# Altium PCB ADCAN_21_22.PcbDoc (part 1 of 2)
Units mm, origin at the board's own origin, x right, y up, seen from the top; angles counter-clockwise.
Board outline 65 x 55 mm, 4 copper layers (Top Layer, GND, 5V, Bottom Layer), stack 0.603 mm thick; 114 components, 59 nets, 280 pads, 0 vias.
Unrouted connection lines stored in the file: 212.
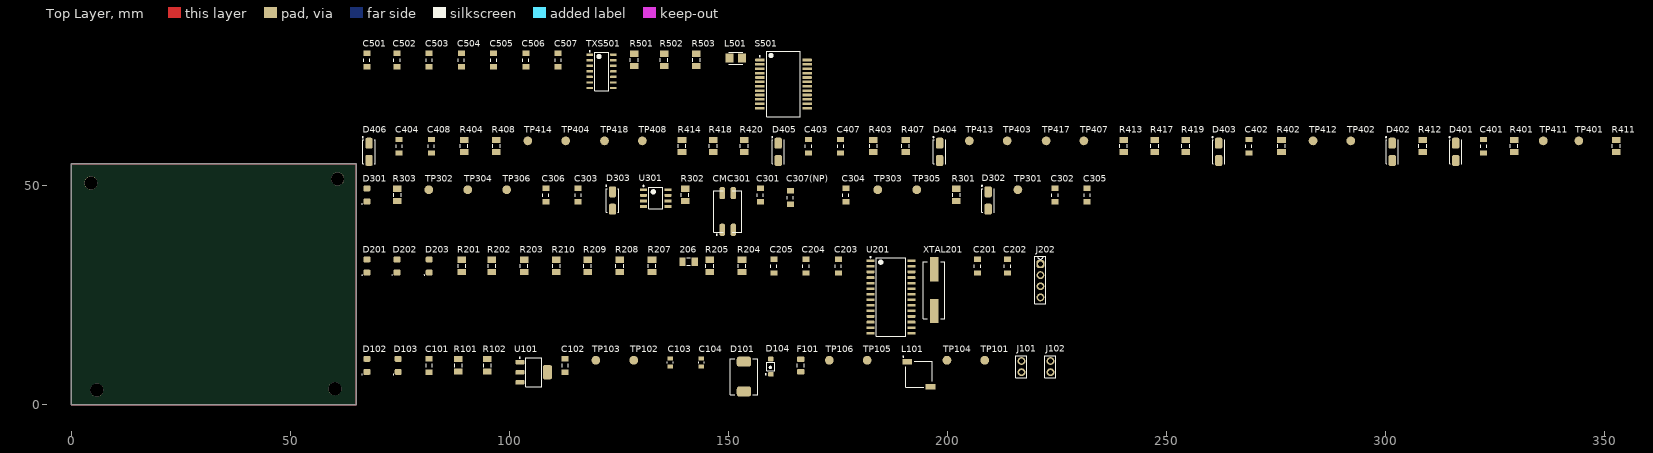
[diagram p0: Top Layer view]
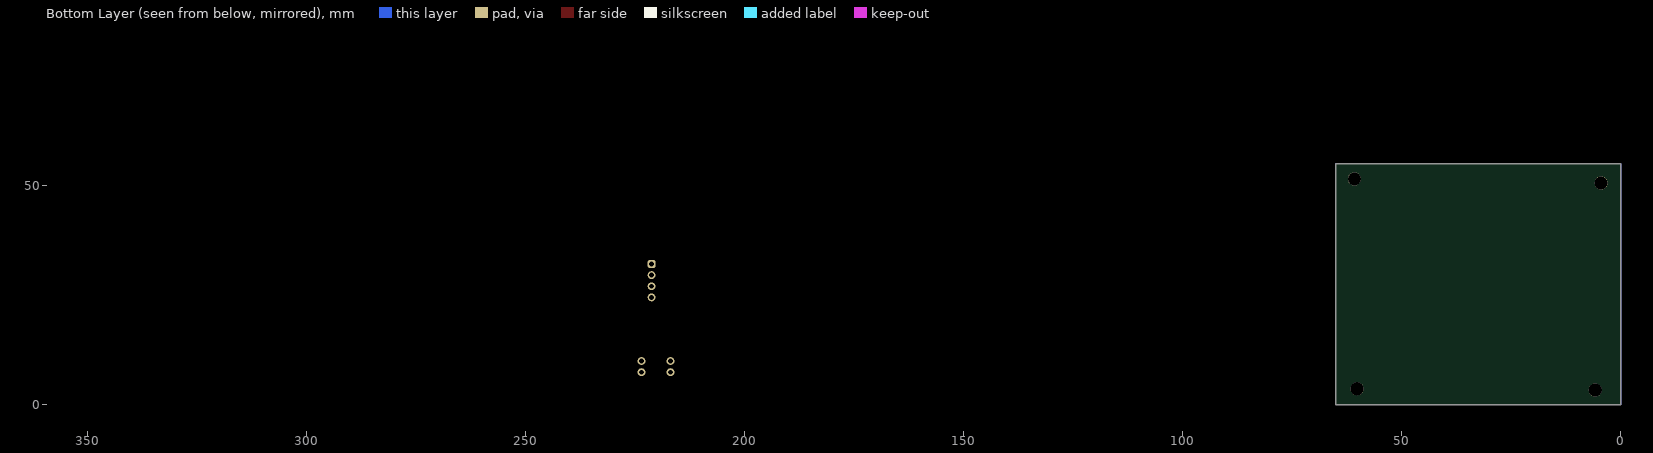
[diagram p1: Bottom Layer view, seen from below]
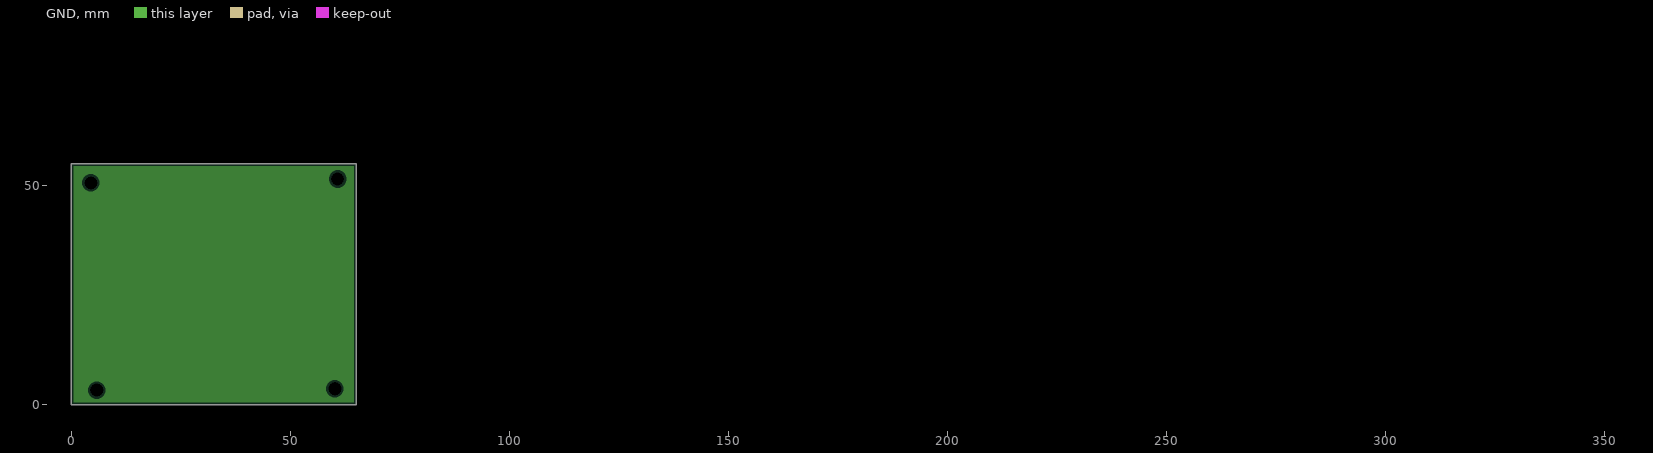
[diagram p2: GND, clearances drawn from the general rule]
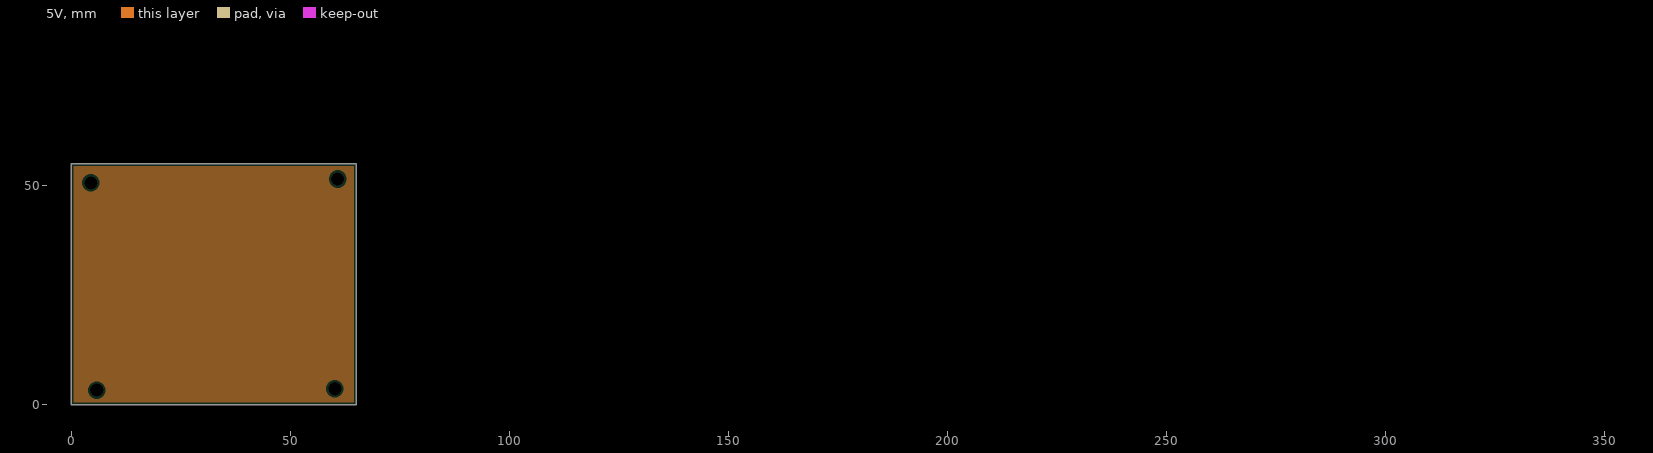
[diagram p3: 5V, clearances drawn from the general rule]

## Layer stack, top to bottom
Top Solder: solder mask 0.0102, Solder Resist, Dk 3.5
Top Layer: signal copper 0.0356
Dielectric 2: prepreg 0.0711, PP-006, Dk 4.1
GND: plane copper 0.035
Dielectric 1: dielectric 0.32, FR-4, Dk 4.8
5V: plane copper 0.035
Dielectric 3: prepreg 0.0711, PP-006, Dk 4.1
Bottom Layer: signal copper 0.0356
Bottom Solder: solder mask 0.0102, Solder Resist, Dk 3.5

## Board outline
0,0 0,55 65,55 65,0

## Design rules (kind name [scope] priority, off if disabled: settings)
Clearance [All] p1: gap=0.254 ignorepadtopadclearanceinfootprint=TRUE except(0: Arc-Hole Track-Hole SMDPad-Hole THPad-Hole Via-Hole Fill-Hole Poly-Hole Region-Hole Text-Hole)
PlaneClearance [All] p1: clearance=0.508
PlaneConnect [All] p1: planeconnectstyle=Relief reliefexpansion=0.508 reliefentries=4 reliefconductorwidth=0.254 reliefairgap=0.254
PolygonConnect [All] p1: connectstyle=Relief reliefconductorwidth=0.254 reliefentries=4 polygonreliefangle="90 Angle" airgapwidth=0.254
RoutingVias [All] p1: holewidth=0.711 width=1.27 viastyle="Through Hole" minholewidth=0.711 minwidth=1.27 maxholewidth=0.711 maxwidth=1.27
SolderMaskExpansion [All] p1: expansion=0.102 istentingtop=FALSE
Width [All] p1: maxlimit=0.254 minlimit=0.254 preferedwidth=0.254
28 further rules are at their usual default settings.

## Classes and differential pairs
component class main: J1

## Components (designator, comment, footprint, x,y, rotation, side; value= is the part's Value field where it differs from the comment)
206 "CRS1206-FX-4701ELF" R1206FTK-W 140.933,32.678 r0 top
C101 "885012208018" C1206FNPC-RW 81.681,8.952 r90 top
C102 "885012208018" C1206FNPC-RW 112.732,8.952 r90 top
C103 "885012207103" C0805FNPC-R 136.758,9.652 r90 top
C104 "885012207103" C0805FNPC-R 143.859,9.652 r90 top
C201 "885012008038" C1206FNPC-RW 206.912,31.653 r90 top
C202 "885012008038" C1206FNPC-RW 213.762,31.653 r90 top
C203 "885012208009" C1206FNPC-RW 175.135,31.653 r90 top
C204 "885012208009" C1206FNPC-RW 167.76,31.653 r90 top
C205 "885012208009" C1206FNPC-RW 160.409,31.653 r90 top
C301 "885012208025" C1206FNPC-RW 157.309,47.879 r90 top
C302 "885012208025" C1206FNPC-RW 224.613,47.879 r90 top
C303 "885012208025" C1206FNPC-RW 115.707,47.879 r90 top
C304 "885012208009" C1206FNPC-RW 176.86,47.879 r90 top
C305 "885012208025" C1206FNPC-RW 231.963,47.879 r90 top
C306 "885012208025" C1206FNPC-RW 108.357,47.879 r90 top
C307(NP) "885012208025" C1206FNPC-RW 164.16,47.304 r90 top
C401 "885012208009" C1206FNPC-RW 322.492,59.029 r90 top
C402 "885012208009" C1206FNPC-RW 268.89,59.029 r90 top
C403 "885012208009" C1206FNPC-RW 168.31,59.029 r90 top
C404 "885012208009" C1206FNPC-RW 74.83,59.029 r90 top
C407 "885012208009" C1206FNPC-RW 175.66,59.029 r90 top
C408 "885012208009" C1206FNPC-RW 82.206,59.029 r90 top
C501 "885012208036" C1206FNPC-RW 67.455,78.705 r90 top
C502 "885012208036" C1206FNPC-RW 74.33,78.705 r90 top
C503 "885012208011" C1206FNPC-RW 81.681,78.705 r90 top
C504 "885012108012" C1206FNPC-RW 89.056,78.705 r90 top
C505 "885012208009" C1206FNPC-RW 96.406,78.705 r90 top
C506 "885012108012" C1206FNPC-RW 103.782,78.705 r90 top
C507 "885012208036" C1206FNPC-RW 111.132,78.705 r90 top
CMC301 "744226" CMC_10u_1.6A 149.884,44.128 r90 top
D101 "824551301" DTVS-DO-214AB 153.584,6.427 r90 top
D102 "150120VS75000" LED_1206_WE 67.48,8.977 r90 top
D103 "150120VS75000" LED_1206_WE 74.605,8.977 r90 top
D104 "MBR0530" DSC-SOD123 159.734,8.702 r90 top
D201 "150120BS75000" LED_1206_WE 67.48,31.678 r90 top
D202 "150120YS75000" LED_1206_WE 74.355,31.678 r90 top
D203 "150120RS75000" LED_1206_WE 81.706,31.678 r90 top
D301 "150120BS75000" LED_1206_WE 67.48,47.904 r90 top
D302 "824501600" DTVS-DO-214AC 209.337,46.629 r90 top
D303 "824501600" DTVS-DO-214AC 123.558,46.629 r90 top
D401 "824501600" DTVS-DO-214AC 316.117,57.754 r90 top
D402 "824501600" DTVS-DO-214AC 301.616,57.754 r90 top
D403 "824501600" DTVS-DO-214AC 261.989,57.754 r90 top
D404 "824501600" DTVS-DO-214AC 198.261,57.754 r90 top
D405 "824501600" DTVS-DO-214AC 161.409,57.754 r90 top
D406 "824501600" DTVS-DO-214AC 67.955,57.754 r90 top
F101 "0437001.WRA" Fuse_1206 166.56,8.952 r90 top
J101 "61300211121" J_Pinheader_1x2 216.962,8.702 r90 top
J102 "61300211121" J_Pinheader_1x2 223.588,8.702 r90 top
J202 "61300411121" J_PinHeader_1x4 221.287,27.053 r0 top
L101 "CDC5D23BNP-470KC" L_47u-490mA_CF 193.536,6.952 r0 top
L501 "744764147" L47u-60mA_CF 151.709,79.155 r0 top
R101 "CRG1206F100R" R1206FTK-W 88.381,9.002 r90 top
R102 "CRG1206F100R" R1206FTK-W 94.981,9.002 r90 top
R201 "CRG1206F100R" R1206FTK-W 89.156,31.703 r90 top
R202 "CRG1206F100R" R1206FTK-W 96.006,31.703 r90 top
R203 "CRG1206F100R" R1206FTK-W 103.382,31.703 r90 top
R204 "CR1206-FX-2201ELF" R1206FTK-W 153.134,31.703 r90 top
R205 "CRS1206-FX-4701ELF" R1206FTK-W 145.784,31.703 r90 top
R207 "CR1206-FX-2201ELF" R1206FTK-W 132.583,31.703 r90 top
R208 "CRS1206-FX-4701ELF" R1206FTK-W 125.208,31.703 r90 top
R209 "CRS1206-FX-4701ELF" R1206FTK-W 117.857,31.703 r90 top
R210 "CRS1206-FX-4701ELF" R1206FTK-W 110.732,31.703 r90 top
R301 "RQ73C2B60R4BTDF" R1206FTK-W 202.086,47.929 r90 top value=60R4
R302 "RQ73C2B60R4BTDF" R1206FTK-W 140.133,47.929 r90 top value=60R4
R303 "CRG1206F100R" R1206FTK-W 74.43,47.929 r90 top
R401 "CRCW12061K60FKEA" R1206FTK-W 329.443,59.079 r90 top
R402 "CRCW12061K60FKEA" R1206FTK-W 276.34,59.079 r90 top
R403 "CRCW12061K60FKEA" R1206FTK-W 183.136,59.079 r90 top
R404 "CRCW12061K60FKEA" R1206FTK-W 89.681,59.079 r90 top
R407 "CRCW12064K30FKEA" R1206FTK-W 190.486,59.079 r90 top
R408 "CRCW12064K30FKEA" R1206FTK-W 97.031,59.079 r90 top
R411 "CRCW12061K60FKEA" R1206FTK-W 352.794,59.079 r90 top
R412 "CRCW12061K60FKEA" R1206FTK-W 308.617,59.079 r90 top
R413 "CRCW12061K60FKEA" R1206FTK-W 240.288,59.079 r90 top
R414 "CRCW12061K60FKEA" R1206FTK-W 139.433,59.079 r90 top
R417 "CRCW12061K60FKEA" R1206FTK-W 247.389,59.079 r90 top
R418 "CRCW12061K60FKEA" R1206FTK-W 146.559,59.079 r90 top
R419 "CRCW12066K19FKEA" R1206FTK-W 254.489,59.079 r90 top
R420 "CRCW12066K19FKEA" R1206FTK-W 153.659,59.079 r90 top
R501 "CRS1206-FX-4701ELF" R1206FTK-W 128.508,78.755 r90 top
R502 "CRS1206-FX-4701ELF" R1206FTK-W 135.358,78.755 r90 top
R503 "CRS1206-FX-4701ELF" R1206FTK-W 142.734,78.755 r90 top
S501 "SCC2230-D08" Accel_SCC2230-D08 162.61,73.23 r0 top
TP101 "TestPoint" TestPoint 208.562,10.152 r90 top
TP102 "TestPoint" TestPoint 128.408,10.152 r90 top
TP103 "TestPoint" TestPoint 119.757,10.152 r90 top
TP104 "TestPoint" TestPoint 199.936,10.152 r90 top
TP105 "TestPoint" TestPoint 181.71,10.152 r90 top
TP106 "TestPoint" TestPoint 173.085,10.152 r90 top
TP301 "TestPoint" TestPoint 216.137,49.104 r90 top
TP302 "TestPoint" TestPoint 81.606,49.104 r90 top
TP303 "TestPoint" TestPoint 184.136,49.104 r90 top
TP304 "TestPoint" TestPoint 90.506,49.104 r90 top
TP305 "TestPoint" TestPoint 193.036,49.104 r90 top
TP306 "TestPoint" TestPoint 99.381,49.104 r90 top
TP401 "TestPoint" TestPoint 344.243,60.254 r90 top
TP402 "TestPoint" TestPoint 292.166,60.254 r90 top
TP403 "TestPoint" TestPoint 213.687,60.254 r90 top
TP404 "TestPoint" TestPoint 112.857,60.254 r90 top
TP407 "TestPoint" TestPoint 231.213,60.254 r90 top
TP408 "TestPoint" TestPoint 130.383,60.254 r90 top
TP411 "TestPoint" TestPoint 336.118,60.254 r90 top
TP412 "TestPoint" TestPoint 283.54,60.254 r90 top
TP413 "TestPoint" TestPoint 205.062,60.254 r90 top
TP414 "TestPoint" TestPoint 104.232,60.254 r90 top
TP417 "TestPoint" TestPoint 222.587,60.254 r90 top
TP418 "TestPoint" TestPoint 121.733,60.254 r90 top
TXS501 "TXS0104E" 4bitBVL_TXS0104E 121.058,76.13 r0 top
U101 "LM1117IMP-3.3/NOPB" LDO_10V-0.8/3V3-SOT223 105.557,7.402 r0 top
U201 "PIC18F2685" U_PIC18F2685 187.161,24.603 r0 top
U301 "MCP2561-H/SN" Transceiver_CAN 133.433,47.179 r0 top
XTAL201 "830028710" XTAL20M_SMD 197.011,26.178 r90 top

## Footprints (in the part's own frame and the unit in brackets; to place one, negate y for a bottom-side part, rotate by r counter-clockwise, add the part's x,y. Pads: shape width x height; smd on the part's side, far side on the other; paste and mask are expansions set on the pad)
4bitBVL_TXS0104E [mm] "SOP, 14-Leads, Body 8,65x3,90mm, Pitch 1,27mm, IPC Medium Density"
  rrect50% 1.5x0.55 smd: 1(-2.7,3.81) 2(-2.7,2.54) 3(-2.7,1.27) 4(-2.7,0) 5(-2.7,-1.27) 6(-2.7,-2.54) 7(-2.7,-3.81) 8(2.7,-3.81) 9(2.7,-2.54) 10(2.7,-1.27) 11(2.7,0) 12(2.7,1.27) 13(2.7,2.54) 14(2.7,3.81)
  silkscreen extent -2.82,-4.4 1.6,4.76, body extent -3.01,-4.32 3.01,4.33, height 1.75
Accel_SCC2230-D08 [mm] "SOP, 24-Leads, Body 15,00x8,50mm, Pitch 1,00mm, IPC Medium Density"
  rrect50% 2.2x0.6 smd: 1(-5.4,5.5) 2(-5.4,4.5) 3(-5.4,3.5) 4(-5.4,2.5) 5(-5.4,1.5) 6(-5.4,0.5) 7(-5.4,-0.5) 8(-5.4,-1.5) 9(-5.4,-2.5) 10(-5.4,-3.5) 11(-5.4,-4.5) 12(-5.4,-5.5) 13(5.4,-5.5) 14(5.4,-4.5) 15(5.4,-3.5) 16(5.4,-2.5) 17(5.4,-1.5) 18(5.4,-0.5) 19(5.4,0.5) 20(5.4,1.5) 21(5.4,2.5) 22(5.4,3.5) 23(5.4,4.5) 24(5.4,5.5)
  silkscreen extent -5.52,-7.5 3.85,7.5, body extent -6.05,-7.5 6.05,7.5, height 4.36
C0805FNPC-R [mm]
  rect 0.9x1.3 smd: 1(-0.95,0) 2(0.95,0)
  silkscreen extent -0.15,-0.65 0.15,0.65, body extent -1.03,-0.63 0.97,0.63, height 0.96
C1206FNPC-RW [mm] "Chip Capacitor, 2-Leads, Body 3,20x1,60mm, IPC Medium Density"
  rect 1.2x1.6 smd: 1(-1.55,0) 2(1.55,0)
  silkscreen extent -0.35,-0.7 0.35,0.7, body extent -1.59,-0.77 1.61,0.83, height 0.91
CMC_10u_1.6A [mm] "Molded Inductor, 2-Leads, Body 9,20x6,00mm, IPC Low Density"
  rrect50% 2.75x1.2 smd: 1(-4.174,1.273) 2(-4.176,-1.273) 3(4.174,-1.273) 4(4.176,1.273)
  silkscreen extent -5.45,-3.15 4.75,3.15, body extent -4.6,-3 4.6,3, height 5.01
DSC-SOD123 [mm] "SOIC, 2-Leads, Body 1,60x2,69mm, Pitch 1,27mm, IPC Low Density"
  rrect50% 1.1x1.3 smd: A(1.75,0) K(-1.75,0)
  silkscreen extent -1.87,-0.9 1,1.32, body extent -1.86,-0.8 1.86,0.8, height 1.36
DTVS-DO-214AB [mm] "Molded Diode, 2-Leads, Body 7,94x5,90mm"
  rrect50% 2.3x3.3 smd: 1(-3.4,0) 2(3.4,0)
  silkscreen extent -4.1,-3.15 4.1,3.15, body extent -4.42,-2.95 4.42,2.95, height 2.9
DTVS-DO-214AC [mm] "Molded Diode, 2-Leads, Body 5,11x2,67mm, IPC Medium Density"
  rrect50% 2.5x1.7 smd: 1(-1.975,0) 2(1.975,0)
  silkscreen extent -2.7,-1.4 3.47,1.52, body extent -2.56,-1.34 2.56,1.34, height 2.5
Fuse_1206 [mm] "Chip Resistor, 2-Leads, Body 3,20x1,58mm, IPC Medium Density"
  rrect50% 1.25x1.75 smd: 1(-1.425,0) 2(1.425,0)
  silkscreen extent -0.4,-0.77 0.4,0.77, body extent -1.6,-0.79 1.6,0.79, height 0.86
J_Pinheader_1x2 [mm]
  round 1.8 hole 1.1: 1(-1.27,0) 2(1.27,0)
  silkscreen extent -2.52,-1.25 2.48,1.29, body extent -2.54,-1.27 2.54,1.27, height 9.5
J_PinHeader_1x4 [mm]
  rrect50% 1.8x1.8 hole 1.1: 1(0,5.08)
  round 1.8 hole 1.1: 2(0,2.54) 3(0,0) 4(0,-2.54)
  silkscreen extent -1.25,-4.03 1.25,6.83, body extent -1.27,-3.81 1.27,6.35, height 9.5
L47u-60mA_CF [mm] "Molded Inductor, 2-Leads, Body 2,90x2,50mm, IPC Low Density"
  rect 1.85x2 smd: 1(-1.425,0) 2(1.425,0)
  silkscreen extent -1.55,-1.35 1.55,1.35, body extent -1.6,-1.25 1.6,1.25, height 2.21
L_47u-490mA_CF [mm] "Precision Wire Wound Inductor, 2-Leads, Body 5,80x5,80mm, IPC Medium Density"
  rect 2.2x1.3 smd: 1(-2.65,2.825) 2(2.643,-2.832)
  silkscreen extent -3.67,-3 3,4.17, body extent -3,-3 3,3, height 2.5
LDO_10V-0.8/3V3-SOT223 [mm] "SOT223, 4-Leads, Body 6,50x7,00mm (avg), Pitch 2,30mm, IPC Low Density"
  rrect50% 2.1x1 smd: 1(-3.15,2.3) 2(-3.15,0) 3(-3.15,-2.3)
  rrect50% 2.1x3.3 smd: 4(3.15,0)
  silkscreen extent -3.27,-3.35 1.8,3.47, body extent -3.5,-3.25 3.5,3.25, height 1.81
LED_1206_WE [mm] "SODFL, 2-Leads, Body 1,60x3,20mm, IPC Medium Density"
  rrect50% 1.4x1.6 smd: A(1.5,0) K(-1.5,0)
  silkscreen extent -2.15,1.05 -2.05,1.15, body extent -1.6,-0.8 1.6,0.8, height 0.68
R1206FTK-W [mm] "Chip Resistor, 2-Leads, Body 3,15x1,60mm, IPC Medium Density"
  rect 1.4x1.95 smd: 1(-1.4,0) 2(1.4,0)
  silkscreen extent -0.4,-0.87 0.4,0.87, body extent -1.58,-0.8 1.58,0.8, height 0.61
TestPoint [mm]
  round 2 smd: 1(0,0)
Transceiver_CAN [mm] "SOIC, 8-Leads, Body 4,90x3,90mm, Pitch 1,27mm, IPC Low Density"
  rrect50% 1.7x0.65 smd: 1(-2.8,1.905) 2(-2.8,0.635) 3(-2.8,-0.635) 4(-2.8,-1.905) 5(2.8,-1.905) 6(2.8,-0.635) 7(2.8,0.635) 8(2.8,1.905)
  silkscreen extent -2.92,-2.45 1.55,2.9, body extent -2.98,-2.43 3.02,2.47, height 1.76
U_PIC18F2685 [mm] "SOIC, 28-Leads, Body 17,90x7,50mm, Pitch 1,27mm, IPC Medium Density"
  rrect50% 1.85x0.6 smd: 1(-4.675,8.255) 2(-4.675,6.985) 3(-4.675,5.715) 4(-4.675,4.445) 5(-4.675,3.175) 6(-4.675,1.905) 7(-4.675,0.635) 8(-4.675,-0.635) 9(-4.675,-1.905) 10(-4.675,-3.175) 11(-4.675,-4.445) 12(-4.675,-5.715) 13(-4.675,-6.985) 14(-4.675,-8.255) 15(4.675,-8.255) 16(4.675,-6.985) 17(4.675,-5.715) 18(4.675,-4.445) 19(4.675,-3.175) 20(4.675,-1.905) 21(4.675,-0.635) 22(4.675,0.635) 23(4.675,1.905) 24(4.675,3.175) 25(4.675,4.445) 26(4.675,5.715) 27(4.675,6.985) 28(4.675,8.255)
  silkscreen extent -4.8,-8.95 3.35,9.23, body extent -5.15,-8.95 5.15,8.95, height 2.66
XTAL20M_SMD [mm]
  rect 5.5x2 smd: 1(-4.75,0) 2(4.75,0)
  silkscreen extent -6.5,-2.45 6.5,2.45, body extent -6.65,-2.47 6.65,2.48, height 4.3

## Part data
206 R205 R208 R209 R210 R501 R502 R503: library part R4.7K-1206FTK, "Res Thick Film 1206 4.7K Ohm 1% 1/2W ±100ppm/°C Molded SMD T/R", Case Code (Imperial)=1206, Case Code (Metric)=3016, Manufacturer 1="Bourns JW Miller", Max Operating Temperature=155°C, Max Power Dissipation=500mW, Min Operating Temperature=-55°C, Resistance=4.7kR, Resistor Type="Thick Film", Supplier Part Number 1=CRS1206-FX-4701ELFCT-ND, Temperature Coefficient=100ppm/°C, Tolerance=1%, Voltage Rating=400V, Case/Package=1206, Category="Chip SMD Resistors", ComponentLink1Description=https://datasheet.ciiva.com/48986/70483705-48986735.pdf?src-supplier=Allied+Electronics, ComponentLink1URL=https://datasheet.ciiva.com/48986/70483705-48986735.pdf?src-supplier=Allied+Electronics, ComponentLink3Description=RS, ComponentLink3URL=https://es.rs-online.com/web/p/resistencias-de-montaje-en-superficie/8672965, Height=0.026inch, Length=0.122inch, Manufacturer Part Number 1=CRS1206-FX-4701ELF, Mount="Surface Mount", Number of Terminations=2, Packaging="Cut Tape", Power Rating=500mW, Pricing 1="1=0,42000, 10=0,35400, 100=0,13850, 1000=0,05796, 2500=0,05313 (USD)", REACH SVHC="No SVHC", RoHS=Yes, Supplier 1=Digi-Key, Termination=SMD/SMT, Voltage Rating (DC)=400V, Width=0.063inch, Working Voltage=400V
C101 C102: library part C10u-10V-1206FNPC-X7R, "Cap, 10ΜF, 10V, 10%, X7R, 1206", Capacitance=10uF, Case Code (Imperial)=1206, Case Code (Metric)=3216, Manufacturer 1="Wurth Electronics", Max Operating Temperature=125°C, Min Operating Temperature=-55°C, Supplier Part Number 1=732-7565-1-ND, Tolerance=10%, Voltage Rating=10V, Case/Package=1206, Category="Ceramic Capacitors", ComponentLink1Description=http://www.farnell.com/datasheets/2031895.pdf?src-supplier=Farnell, ComponentLink1URL=http://www.farnell.com/datasheets/2031895.pdf?src-supplier=Farnell, ComponentLink2Description=https://katalog.we-online.de/pbs/datasheet/885012208018.pdf?src-supplier=Digi-Key, ComponentLink2URL=https://katalog.we-online.de/pbs/datasheet/885012208018.pdf?src-supplier=Digi-Key, ComponentLink3Description=http://www.farnell.com/datasheets/2031895.pdf?src-supplier=Newark, ComponentLink3URL=http://www.farnell.com/datasheets/2031895.pdf?src-supplier=Newark, ComponentLink4Description="Wurth Elektronik", ComponentLink4URL=https://www.we-online.com/catalog/en/WCAP-CSGP-10VDC?sq=885012208018#885012208018, Length=0.126inch, Manufacturer Part Number 1=885012208018, Mount="Surface Mount", Packaging="Tape and Reel", Pricing 1="1=0,66000, 10=0,59800, 100=0,53600, 500=0,47400 (USD)", RoHS=Yes, RoHS Compliant=Yes, Stock 1=7, Supplier 1=Digi-Key, Thickness=0.075inch, Width=0.063inch
C103 C104: library part C1u-50V-0805FNPC-X7R, "Multilayer Ceramic Capacitor, Wcap-Csgp Series, 1 F, 10%, X7R, 50 V, 0805 [2012 Metric] Rohs Compliant: Yes", Capacitance=1uF, Case Code (Imperial)=0805, Case Code (Metric)=2012, Dielectric=X7R, Manufacturer 1="Wurth Electronics", Max Operating Temperature=85°C, Min Operating Temperature=-55°C, Supplier Part Number 1=1813523, Tolerance=10%, Voltage Rating=50V, .Creator=GP, Case/Package=0805, Category="Ceramic Capacitors", ComponentLink1Description=http://www.farnell.com/datasheets/1958501.pdf?src-supplier=Farnell, ComponentLink1URL=http://www.farnell.com/datasheets/1958501.pdf?src-supplier=Farnell, ComponentLink2Description=http://www.farnell.com/datasheets/1958501.pdf?src-supplier=Element14, ComponentLink2URL=http://www.farnell.com/datasheets/1958501.pdf?src-supplier=Element14, ComponentLink3Description=https://katalog.we-online.de/pbs/datasheet/885012107003.pdf?src-supplier=Digi-Key, ComponentLink3URL=https://katalog.we-online.de/pbs/datasheet/885012107003.pdf?src-supplier=Digi-Key, ComponentLink4Description=http://www.farnell.com/datasheets/1958501.pdf?src-supplier=Newark, ComponentLink4URL=http://www.farnell.com/datasheets/1958501.pdf?src-supplier=Newark, Length=0.079inch, Manufacturer Part Number 1=885012207103, Mount="Surface Mount", Packaging="Cut Tape", Pricing 1="50=0,27200, 250=0,25300, 500=0,22800, 1250=0,20100, 2500=0,17100 (GBP)", REACH SVHC=Unknown, RoHS=Yes, RoHS Compliant=Yes, Stock 1=5100, Supplier 1=RSComponents, Thickness=0.053inch, Voltage Rating (DC)=50V, Width=0.049inch
C201 C202: library part C15p-50V-1206FNPC-NP0, "Cap, 15Pf, 50V, 5%, C0G/np0, 1206 Rohs Compliant: Yes", Capacitance=15pF, Case Code (Imperial)=1206, Case Code (Metric)=3216, Manufacturer="Wurth Electronics", Max Operating Temperature=125°C, Min Operating Temperature=-55°C, Supplier Part Number 1=732-7882-1-ND, Tolerance=5%, Voltage Rating=50V, Case/Package=1206, Category=Capacitor, ComponentLink1Description=Datasheet, ComponentLink1URL=https://www.we-online.com/catalog/datasheet/885012008038.pdf, ComponentLink2Description="Where buy it", ComponentLink2URL=https://www.we-online.com/catalog/en/WCAP-CSGP-50VDC?sq=885012008038#885012008038, ComponentLink3Description=http://www.farnell.com/datasheets/2546700.pdf?src-supplier=Farnell, ComponentLink3URL=http://www.farnell.com/datasheets/2546700.pdf?src-supplier=Farnell, ComponentLink4Description=https://katalog.we-online.de/pbs/datasheet/885012008038.pdf?src-supplier=Digi-Key, ComponentLink4URL=https://katalog.we-online.de/pbs/datasheet/885012008038.pdf?src-supplier=Digi-Key, Length=0.126inch, Manufacturer Part Number=885012008038, Mount="Surface Mount", Packaging="Tape and Reel", Pricing 1="1=0,11000, 10=0,10000, 100=0,09000, 500=0,08000 (USD)", RoHS=Yes, RoHS Compliant=Yes, Stock 1=6999, Supplier 1=Digi-Key, Thickness=0.035inch, Width=0.063inch
C203 C304 C401 C402 C403 C404 C407 C408 C505: library part C100n-10V-1206FNPC-X7R, "Cap, 0.1ΜF, 10V, 10%, X7R, 1206", Capacitance=100nF, Case Code (Imperial)=1206, Case Code (Metric)=3216, Manufacturer 1="Wurth Electronics", Max Operating Temperature=125°C, Min Operating Temperature=-55°C, Supplier Part Number 1=732-8086-1-ND, Tolerance=10%, Voltage Rating=10V, Case/Package=1206, Category="Ceramic Capacitors", ComponentLink1Description=http://www.farnell.com/datasheets/2031891.pdf?src-supplier=Farnell, ComponentLink1URL=http://www.farnell.com/datasheets/2031891.pdf?src-supplier=Farnell, ComponentLink2Description=http://katalog.we-online.de/pbs/datasheet/885012208009.pdf?src-supplier=Digi-Key, ComponentLink2URL=http://katalog.we-online.de/pbs/datasheet/885012208009.pdf?src-supplier=Digi-Key, ComponentLink3Description=https://katalog.we-online.de/pbs/datasheet/885012208009.pdf?src-supplier=Digi-Key, ComponentLink3URL=https://katalog.we-online.de/pbs/datasheet/885012208009.pdf?src-supplier=Digi-Key, ComponentLink4Description="Wurth Elektronik", ComponentLink4URL=https://www.we-online.com/catalog/en/WCAP-CSGP-10VDC?sq=885012208009#885012208009, Length=0.126inch, Manufacturer Part Number 1=885012208009, Mount="Surface Mount", Packaging="Tape and Reel", Pricing 1="1=0,11000, 10=0,10300, 100=0,09200, 500=0,08100 (USD)", RoHS=Yes, RoHS Compliant=Yes, Stock 1=7198, Supplier 1=Digi-Key, Thickness=0.035inch, Width=0.063inch
C204: library part C100n-10V-1206FNPC-X7R, "Cap, 0.1ΜF, 10V, 10%, X7R, 1206", Capacitance=10nF, Case Code (Imperial)=1206, Case Code (Metric)=3216, Manufacturer 1="Wurth Electronics", Max Operating Temperature=125°C, Min Operating Temperature=-55°C, Supplier Part Number 1=732-8086-1-ND, Tolerance=10%, Voltage Rating=10V, Case/Package=1206, Category="Ceramic Capacitors", ComponentLink1Description=http://www.farnell.com/datasheets/2031891.pdf?src-supplier=Farnell, ComponentLink1URL=http://www.farnell.com/datasheets/2031891.pdf?src-supplier=Farnell, ComponentLink2Description=http://katalog.we-online.de/pbs/datasheet/885012208009.pdf?src-supplier=Digi-Key, ComponentLink2URL=http://katalog.we-online.de/pbs/datasheet/885012208009.pdf?src-supplier=Digi-Key, ComponentLink3Description=https://katalog.we-online.de/pbs/datasheet/885012208009.pdf?src-supplier=Digi-Key, ComponentLink3URL=https://katalog.we-online.de/pbs/datasheet/885012208009.pdf?src-supplier=Digi-Key, ComponentLink4Description="Wurth Elektronik", ComponentLink4URL=https://www.we-online.com/catalog/en/WCAP-CSGP-10VDC?sq=885012208009#885012208009, Length=0.126inch, Manufacturer Part Number 1=885012208009, Mount="Surface Mount", Packaging="Tape and Reel", Pricing 1="1=0,11000, 10=0,10300, 100=0,09200, 500=0,08100 (USD)", RoHS=Yes, RoHS Compliant=Yes, Stock 1=7198, Supplier 1=Digi-Key, Thickness=0.035inch, Width=0.063inch
C205: library part C100n-10V-1206FNPC-X7R, "Cap, 0.1ΜF, 10V, 10%, X7R, 1206", Capacitance=1uF, Case Code (Imperial)=1206, Case Code (Metric)=3216, Manufacturer 1="Wurth Electronics", Max Operating Temperature=125°C, Min Operating Temperature=-55°C, Supplier Part Number 1=732-8086-1-ND, Tolerance=10%, Voltage Rating=10V, Case/Package=1206, Category="Ceramic Capacitors", ComponentLink1Description=http://www.farnell.com/datasheets/2031891.pdf?src-supplier=Farnell, ComponentLink1URL=http://www.farnell.com/datasheets/2031891.pdf?src-supplier=Farnell, ComponentLink2Description=http://katalog.we-online.de/pbs/datasheet/885012208009.pdf?src-supplier=Digi-Key, ComponentLink2URL=http://katalog.we-online.de/pbs/datasheet/885012208009.pdf?src-supplier=Digi-Key, ComponentLink3Description=https://katalog.we-online.de/pbs/datasheet/885012208009.pdf?src-supplier=Digi-Key, ComponentLink3URL=https://katalog.we-online.de/pbs/datasheet/885012208009.pdf?src-supplier=Digi-Key, ComponentLink4Description="Wurth Elektronik", ComponentLink4URL=https://www.we-online.com/catalog/en/WCAP-CSGP-10VDC?sq=885012208009#885012208009, Length=0.126inch, Manufacturer Part Number 1=885012208009, Mount="Surface Mount", Packaging="Tape and Reel", Pricing 1="1=0,11000, 10=0,10300, 100=0,09200, 500=0,08100 (USD)", RoHS=Yes, RoHS Compliant=Yes, Stock 1=7198, Supplier 1=Digi-Key, Thickness=0.035inch, Width=0.063inch
C301 C302 C303 C305 C306 C307(NP): library part C4.7n-16V-1206FNPC-X7R, "Cap, 4700PF, 16V, 10%, X7R, 1206", Capacitance=4.7nF, Case Code (Imperial)=1206, Case Code (Metric)=3216, Manufacturer="Wurth Electronics", Max Operating Temperature=125°C, Min Operating Temperature=-55°C, Supplier Part Number 1=732-8092-1-ND, Tolerance=10%, Voltage Rating=16V, Case/Package=1206, Category=Capacitor, ComponentLink1Description=Datasheet, ComponentLink1URL=https://www.we-online.com/catalog/datasheet/885012208025.pdf, ComponentLink2Description="Where buy it", ComponentLink2URL=https://www.we-online.com/catalog/en/WCAP-CSGP-16VDC#885012208025, Height=1.6mm, Length=0.126inch, Manufacturer Part Number=885012208025, Material=Ceramic, Mount="Surface Mount", Packaging="Cut Tape", Pricing 1="1=0,14000, 10=0,12500, 100=0,11200, 500=0,09900 (USD)", RoHS=Yes, RoHS Compliant=Yes, Stock 1=2013, Supplier 1=Digi-Key, Thickness=0.035inch, Width=0.063inch
C501 C502 C507: library part C1u-16V-1206FNPC-X7R, "Cap Cer 1UF 16V X7R 1206", Capacitance=1uF, Case Code (Imperial)=1206, Case Code (Metric)=3216, Manufacturer="Wurth Electronics", Max Operating Temperature=125°C, Min Operating Temperature=-55°C, Supplier Part Number 1=710-885012208036, Tolerance=10%, Voltage Rating=16V, Case/Package=1206, Category=Capacitor, ComponentLink1Description=Datasheet, ComponentLink1URL=https://www.we-online.com/catalog/datasheet/885012208036.pdf, ComponentLink2Description="Where buy it", ComponentLink2URL=https://www.we-online.com/catalog/en/WCAP-CSGP-16VDC#885012208036, Length=0.126inch, Manufacturer Part Number=885012208036, Mount="Surface Mount", Packaging="Tape and Reel", Pricing 1="1=0,15000, 10=0,13900, 50=0,13900, 100=0,12400, 500=0,11000, 1000=0,11000, 3000=0,09100, 10000=0,09100 (USD)", RoHS=Yes, RoHS Compliant=Yes, Stock 1=5938, Supplier 1=Mouser, Thickness=0.051inch, Width=0.063inch
C503: library part C470n-10V-1206FNPC-X7R, "Cap, 0.47ΜF, 10V, 10%, X7R, 1206", Capacitance=470nF, Case Code (Imperial)=1206, Case Code (Metric)=3216, Manufacturer 1="Wurth Electronics", Max Operating Temperature=125°C, Min Operating Temperature=-55°C, Supplier Part Number 1=732-7683-1-ND, Tolerance=10%, Voltage Rating=10V, Case/Package=1206, Category="Ceramic Capacitors", ComponentLink1Description=http://www.farnell.com/datasheets/2546926.pdf?src-supplier=Farnell, ComponentLink1URL=http://www.farnell.com/datasheets/2546926.pdf?src-supplier=Farnell, ComponentLink2Description=https://katalog.we-online.de/pbs/datasheet/885012208011.pdf?src-supplier=Digi-Key, ComponentLink2URL=https://katalog.we-online.de/pbs/datasheet/885012208011.pdf?src-supplier=Digi-Key, ComponentLink3Description="Wurth Elektronik", ComponentLink3URL=https://www.we-online.com/catalog/en/WCAP-CSGP-10VDC?sq=885012208011#885012208011, Length=0.126inch, Manufacturer Part Number 1=885012208011, Mount="Surface Mount", Packaging="Tape and Reel", Pricing 1="1=0,20000, 10=0,17700, 100=0,15900, 500=0,14000 (USD)", RoHS=Yes, RoHS Compliant=Yes, Stock 1=1142, Supplier 1=Digi-Key, Thickness=0.051inch, Width=0.063inch
C504 C506: library part C47u-10V-1206FNPC-X5R, "Multilayer Ceramic Capacitor, Wcap-Csgp Series, 47 F, 20%, X5r, 10 V, 1206 [3216 Metric]", Capacitance=47uF, Case Code (Imperial)=1206, Case Code (Metric)=3216, Dielectric=X5R, Manufacturer 1="Wurth Electronics", Max Operating Temperature=85°C, Min Operating Temperature=-55°C, Supplier Part Number 1=732-7638-1-ND, Tolerance=20%, Voltage Rating=10V, Case/Package=1206, Category="Ceramic Capacitors", ComponentLink1Description=http://www.farnell.com/datasheets/1958457.pdf?src-supplier=Farnell, ComponentLink1URL=http://www.farnell.com/datasheets/1958457.pdf?src-supplier=Farnell, ComponentLink2Description=https://katalog.we-online.de/pbs/datasheet/885012108012.pdf?src-supplier=Digi-Key, ComponentLink2URL=https://katalog.we-online.de/pbs/datasheet/885012108012.pdf?src-supplier=Digi-Key, ComponentLink3Description=http://www.farnell.com/datasheets/1958457.pdf?src-supplier=Element14, ComponentLink3URL=http://www.farnell.com/datasheets/1958457.pdf?src-supplier=Element14, ComponentLink4Description="Wurth Elektronik", ComponentLink4URL=https://www.we-online.com/catalog/en/WCAP-CSGP-10VDC?sq=885012108012#885012108012, Length=0.126inch, Manufacturer Part Number 1=885012108012, Mount="Surface Mount", Packaging="Cut Tape", Pricing 1="1=1,26000, 10=1,14000, 100=1,02200, 500=0,90400 (USD)", REACH SVHC=Unknown, RoHS=Yes, RoHS Compliant=Yes, Stock 1=2003, Supplier 1=Digi-Key, Thickness=0.075inch, Voltage Rating (DC)=10V, Width=0.063inch
CMC301: library part CMC_10u_1.6A, "Common Mode Chokes Dual 10uH 920Ohm 1kHz 1.6A 80mOhm DCR SMD T/R", Case/Package=SMD/SMT, Current=1.6A, DC Resistance (DCR)=80mR, Inductance=10uH, Inductance Tolerance=30%, Manufacturer="Wurth Electronics", Max Operating Temperature=125°C, Min Operating Temperature=-40°C, Package Quantity=1, Supplier Part Number 1=732-1475-1-ND, Test Frequency=1kHz, Voltage Rating=80V, Category="Common Mode Line Filter", ComponentLink1Description=Datasheet, ComponentLink1URL=https://www.we-online.com/catalog/datasheet/744226.pdf, ComponentLink2Description="Where buy it", ComponentLink2URL=https://www.we-online.com/catalog/en/WE-SL2?sq=744226#744226, Core Material=Ferrite, Current Rating=1.6A, DC Current=1.6A, Depth=6.3mm, Height=5mm, Impedance=920R, Lead Free="Lead Free", Length=9.2mm, Manufacturer Part Number=744226, Max DC Current=1.6A, Mount="Surface Mount", Number of Lines=2, Number of Pins=4, Packaging="Tape and Reel", Pricing 1="1=2,55000, 10=2,51500, 50=2,27200, 100=2,19100, 500=2,02900 (USD)", REACH SVHC="No SVHC", Resistance=80mR, RoHS=Yes, RoHS Compliant=Yes, Series=WE-SL2, Stock 1=1943, Supplier 1=Digi-Key, Termination=SMD/SMT, Tolerance=30%, Voltage Rating (DC)=80V, Weight=0.017672oz, Width=6mm
D101: library part DTVS-40V-DO-214AB, "TVS diode [Würth Elektronik] 824551301 TVS diode", Clamping Voltage=48.4V, Manufacturer="Wurth Electronics", Max Breakdown Voltage=35.05V, Max Operating Temperature=150°C, Min Operating Temperature=-65°C, Peak Pulse Current=62A, Peak Pulse Power=3kW, Power Line Protection=No, Resistor Type=Zener, Reverse Standoff Voltage=30V, Supplier Part Number 1=9217092P, .Creator=DO, Category="TVS Diodes", ComponentLink1Description=http://www.farnell.com/datasheets/2036459.pdf?src-supplier=Element14, ComponentLink1URL=http://www.farnell.com/datasheets/2036459.pdf?src-supplier=Element14, ComponentLink2Description="Where buy it", ComponentLink2URL=https://www.we-online.com/catalog/en/WE-TVSP?sq=824551301#824551301, Manufacturer Part Number=824551301, Min Breakdown Voltage=35.05V, Mount="Surface Mount", Number of Bidirectional Channels=1, Number of Pins=2, Packaging="Cut Tape", Polarity=Bidirectional, Pricing 1="10=1,72500, 50=1,54700, 100=1,45300, 250=1,35100, 500=1,15000 (USD)", REACH SVHC=Unknown, RoHS=Yes, RoHS Compliant=Yes, Stock 1=1, Supplier 1=RSComponents
D102 D103: library part LEDBGS-1206-40, "Led, Green, 570 Nm, 2 V, 30 Ma, 40 Mcd Rohs Compliant: Yes", Case Code (Imperial)=1206, Case Code (Metric)=3216, Color="Bright Green", Forward Current=30mA, Forward Voltage=2V, Manufacturer="Wurth Electronics", Max Operating Temperature=85°C, Min Operating Temperature=-40°C, Package Quantity=1, Supplier Part Number 1=8154253P, Test Current=20mA, Case/Package=1206, Category=LEDs, ComponentLink1Description=https://datasheet.ciiva.com/29561/150120vs75000-29561865.pdf?src-supplier=Digi-Key, ComponentLink1URL=https://datasheet.ciiva.com/29561/150120vs75000-29561865.pdf?src-supplier=Digi-Key, ComponentLink2Description=https://datasheet.ciiva.com/29279/759444-da-01-en-chipled-1206-w-kl-h-gruen-150120vs7500-29279050.pdf?src-supplier=Conrad, ComponentLink2URL=https://datasheet.ciiva.com/29279/759444-da-01-en-chipled-1206-w-kl-h-gruen-150120vs7500-29279050.pdf?src-supplier=Conrad, ComponentLink3Description=https://datasheet.ciiva.com/29561/150120vs75000-29561866.pdf?src-supplier=Digi-Key, ComponentLink3URL=https://datasheet.ciiva.com/29561/150120vs75000-29561866.pdf?src-supplier=Digi-Key, ComponentLink4Description=https://datasheet.ciiva.com/22656/1911467-22656987.pdf?src-supplier=Element14, ComponentLink4URL=https://datasheet.ciiva.com/22656/1911467-22656987.pdf?src-supplier=Element14, ComponentLink5Description=https://datasheet.ciiva.com/29561/150120vs75000-29561867.pdf?src-supplier=Digi-Key, ComponentLink5URL=https://datasheet.ciiva.com/29561/150120vs75000-29561867.pdf?src-supplier=Digi-Key, ComponentLink6Description="Where buy it", ComponentLink6URL=https://www.we-online.com/catalog/en/WL-SMCW#/articles/WL-SMCW-1206, Dominant Wavelength=570nm, Height=0.68mm, Length=3.2mm, Lens Style=Clear,Rectangular, Luminous Intensity=40mcd, Manufacturer Part Number=150120VS75000, Mount="Surface Mount", Packaging="Tape and Reel", Pricing 1="50=0,23500, 500=0,16600, 750=0,15700, 1500=0,15100, 3000=0,14500 (USD)", REACH SVHC=Unknown, RoHS=Yes, RoHS Compliant=Yes, Stock 1=1, Supplier 1=RSComponents, Viewing Angle=140°, Wavelength=570nm, Width=1.6mm
D104: library part DSC-0.5/30-SOD123, "VR=30V IF=500mA 30pF P=410mW", Average Rectified Current=500mA, Forward Voltage=430mV, Max Forward Surge Current (Ifsm)=5.5A, Max Repetitive Reverse Voltage (Vrrm)=30V, Max Reverse Current=130uA, Package Quantity=1, Supplier Part Number 1=15R3453, .Creator=GP, Category=Diode, ComponentLink1Description=Datasheet, ComponentLink2Description="Where buy it", ComponentLink3Description=https://datasheet.ciiva.com/30479/0900766b810e2512-30479401.pdf?src-supplier=RSComponents, ComponentLink3URL=https://datasheet.ciiva.com/30479/0900766b810e2512-30479401.pdf?src-supplier=RSComponents, ComponentLink4Description=https://datasheet.ciiva.com/34301/974753-34301826.pdf?src-supplier=Jameco, ComponentLink4URL=https://datasheet.ciiva.com/34301/974753-34301826.pdf?src-supplier=Jameco, ComponentLink5Description=https://datasheet.ciiva.com/910/mbr0530-910516.pdf?src-supplier=Digi-Key, ComponentLink5URL=https://datasheet.ciiva.com/910/mbr0530-910516.pdf?src-supplier=Digi-Key, ComponentLink6Description=https://datasheet.ciiva.com/25931/mbr0530-25931989.pdf?src-supplier=Avnet+Europe, ComponentLink6URL=https://datasheet.ciiva.com/25931/mbr0530-25931989.pdf?src-supplier=Avnet+Europe, ComponentLink7Description=https://datasheet.ciiva.com/8300/mbr0530-8300905.pdf?src-supplier=Avnet, ComponentLink7URL=https://datasheet.ciiva.com/8300/mbr0530-8300905.pdf?src-supplier=Avnet, ComponentLink8Description=https://datasheet.ciiva.com/17318/mbr0530-17318568.pdf?src-supplier=Future+Electronics, ComponentLink8URL=https://datasheet.ciiva.com/17318/mbr0530-17318568.pdf?src-supplier=Future+Electronics, ComponentLink9Description=https://datasheet.ciiva.com/15144/getdatasheetpartid-86760-15144598.pdf?src-supplier=Verical, ComponentLink9URL=https://datasheet.ciiva.com/15144/getdatasheetpartid-86760-15144598.pdf?src-supplier=Verical, ComponentLink10Description=https://datasheet.ciiva.com/910/mbr0530-910518.pdf?src-supplier=Digi-Key, ComponentLink10URL=https://datasheet.ciiva.com/910/mbr0530-910518.pdf?src-supplier=Digi-Key, Contact Plating=Tin,Matte, Current Rating=500mA, Element Configuration=Single, Forward Current=500mA, Height=1.03mm, Lead Free="Lead Free", Length=2.7mm, Max Reverse Leakage Current=130uA, Max Reverse Voltage (DC)=30V, Max Surge Current=5.5A, Mount="Surface Mount", Output Current=500mA, Peak Non-Repetitive Surge Current=5.5A, Polarity=Standard, Pricing 1="1=0,34400, 10=0,23900, 100=0,12200, 500=0,10000 (USD)", Radiation Hardening=No, REACH SVHC="No SVHC", RoHS Compliant=Yes, Series=-, Stock 1=9, Supplier 1=Newark, Voltage Rating (DC)=30V, Weight=0.03g, Width=1.6mm
D201 D301: library part LEDBS-1206-145, "Led, Blue, 470 Nm, 3.2 V, 30 Ma, 145 Mcd Rohs Compliant: Yes", Case Code (Imperial)=1206, Case Code (Metric)=3216, Color=Blue, Forward Current=30mA, Forward Voltage=3.2V, Manufacturer="Wurth Electronics", Max Operating Temperature=85°C, Min Operating Temperature=-40°C, Package Quantity=3000, Supplier Part Number 1=8154243, Test Current=20mA, Case/Package=1206, Category=LEDs, ComponentLink1Description=https://datasheet.ciiva.com/22656/150120bs75000-22656976.pdf?src-supplier=Element14, ComponentLink1URL=https://datasheet.ciiva.com/22656/150120bs75000-22656976.pdf?src-supplier=Element14, ComponentLink2Description=https://datasheet.ciiva.com/29279/759440-da-01-en-chipled-1206-w-kl-blau-150120bs75000-29279045.pdf?src-supplier=Conrad, ComponentLink2URL=https://datasheet.ciiva.com/29279/759440-da-01-en-chipled-1206-w-kl-blau-150120bs75000-29279045.pdf?src-supplier=Conrad, ComponentLink3Description=https://datasheet.ciiva.com/29561/150120bs75000-29561882.pdf?src-supplier=Digi-Key, ComponentLink3URL=https://datasheet.ciiva.com/29561/150120bs75000-29561882.pdf?src-supplier=Digi-Key, ComponentLink4Description="Where buy it", ComponentLink4URL=https://www.we-online.com/catalog/en/WL-SMCW?sq=150120BS75000#150120BS75000, Dominant Wavelength=470nm, Height=0.68mm, Length=3.2mm, Lens Style=Clear,Rectangular, Luminous Intensity=145mcd, Manufacturer Part Number=150120BS75000, Mount="Surface Mount", Packaging="Tape and Reel", Pricing 1="50=0,23200, 500=0,16400, 750=0,15500, 1500=0,15000, 3000=0,14200 (USD)", REACH SVHC=Unknown, RoHS=Yes, RoHS Compliant=Yes, Stock 1=1, Supplier 1=RSComponents, Viewing Angle=140°, Wavelength=470nm, Width=1.6mm
D202: library part LEDYS-1206-120, "Led, Yellow, 590 Nm, 2 V, 30 Ma, 120 Mcd Rohs Compliant: Yes", Case Code (Imperial)=1206, Case Code (Metric)=3216, Color=Yellow, Forward Current=30mA, Forward Voltage=2V, Manufacturer="Wurth Electronics", Max Operating Temperature=85°C, Min Operating Temperature=-40°C, Package Quantity=3000, Supplier Part Number 1=95W3811, Test Current=20mA, Case/Package=1206, Category=LEDs, ComponentLink1Description=https://datasheet.ciiva.com/29561/150120ys75000-29561868.pdf?src-supplier=Digi-Key, ComponentLink1URL=https://datasheet.ciiva.com/29561/150120ys75000-29561868.pdf?src-supplier=Digi-Key, ComponentLink2Description=https://datasheet.ciiva.com/29279/759445-da-01-en-chipled-1206-w-kl-gelb-150120ys75000-29279074.pdf?src-supplier=Conrad, ComponentLink2URL=https://datasheet.ciiva.com/29279/759445-da-01-en-chipled-1206-w-kl-gelb-150120ys75000-29279074.pdf?src-supplier=Conrad, ComponentLink3Description="Where buy it", ComponentLink3URL=https://www.we-online.com/catalog/en/WL-SMCW?sq=150120YS75000#150120YS75000, Dominant Wavelength=590nm, Height=0.68mm, Length=3.2mm, Lens Style=Clear,Rectangular, Luminous Intensity=120mcd, Manufacturer Part Number=150120YS75000, Mount="Surface Mount", Packaging="Tape and Reel", Pricing 1="1=0,22700, 5=0,22700, 10=0,22100, 25=0,21300, 50=0,20700, 100=0,18200, 500=0,16200 (USD)", REACH SVHC=Unknown, RoHS=Yes, RoHS Compliant=Yes, Stock 1=7333, Supplier 1=Newark, Viewing Angle=140°, Wavelength=590nm, Width=1.6mm
D203: library part LEDRS-1206-150, "Led, Red, 625 Nm, 2 V, 30 Ma, 150 Mcd Rohs Compliant: Yes", Case Code (Imperial)=1206, Case Code (Metric)=3216, Color=Red, Forward Current=30mA, Forward Voltage=2V, Manufacturer="Wurth Electronics", Max Operating Temperature=85°C, Min Operating Temperature=-40°C, Package Quantity=1, Supplier Part Number 1=8154256P, Test Current=20mA, Case/Package=1206, Category=LEDs, ComponentLink1Description=https://datasheet.ciiva.com/29561/150120rs75000-29561888.pdf?src-supplier=Digi-Key, ComponentLink1URL=https://datasheet.ciiva.com/29561/150120rs75000-29561888.pdf?src-supplier=Digi-Key, ComponentLink2Description=https://datasheet.ciiva.com/29279/759442-da-01-en-chipled-1206-w-kl-rot-150120rs75000-29279067.pdf?src-supplier=Conrad, ComponentLink2URL=https://datasheet.ciiva.com/29279/759442-da-01-en-chipled-1206-w-kl-rot-150120rs75000-29279067.pdf?src-supplier=Conrad, ComponentLink3Description=https://datasheet.ciiva.com/22656/1911465-22656982.pdf?src-supplier=Element14, ComponentLink3URL=https://datasheet.ciiva.com/22656/1911465-22656982.pdf?src-supplier=Element14, ComponentLink4Description=https://datasheet.ciiva.com/48430/150120rs75000-eng-tds-48430054.pdf?src-supplier=Distrelec, ComponentLink4URL=https://datasheet.ciiva.com/48430/150120rs75000-eng-tds-48430054.pdf?src-supplier=Distrelec, ComponentLink5Description="Where buy it", ComponentLink5URL=https://www.we-online.com/catalog/en/WL-SMCW#/articles/WL-SMCW-1206, Dominant Wavelength=625nm, Height=0.68mm, Length=3.2mm, Lens Style=Clear,Rectangular, Luminous Intensity=150mcd, Manufacturer Part Number=150120RS75000, Mount="Surface Mount", Packaging="Tape and Reel", Pricing 1="50=0,23200, 500=0,16400, 750=0,15500, 1500=0,15000, 3000=0,14200 (USD)", REACH SVHC=Unknown, RoHS=Yes, RoHS Compliant=Yes, Stock 1=1, Supplier 1=RSComponents, Viewing Angle=140°, Wavelength=625nm, Width=1.6mm
D302 D303 D401 D402 D403 D404 D405 D406: library part DTVS-6V-DO-214AC, "TVS diode [Würth Elektronik] 824501600 TVS diode", Clamping Voltage=10.3V, Manufacturer="Wurth Electronics", Max Breakdown Voltage=7.02V, Max Operating Temperature=150°C, Min Operating Temperature=-65°C, Peak Pulse Current=38.8A, Peak Pulse Power=400W, Power Line Protection=No, Resistor Type=Zener, Reverse Standoff Voltage=6V, Supplier Part Number 1=710-824501600, Category="TVS Diodes", ComponentLink1Description="Where buy it", ComponentLink1URL=https://www.we-online.com/catalog/en/WE-TVSP?sq=824501600#824501600, ComponentLink2Description=http://www.farnell.com/datasheets/2036401.pdf?src-supplier=Element14, ComponentLink2URL=http://www.farnell.com/datasheets/2036401.pdf?src-supplier=Element14, ComponentLink3Description=https://katalog.we-online.de/pbs/datasheet/824501600.pdf?src-supplier=Digi-Key, ComponentLink3URL=https://katalog.we-online.de/pbs/datasheet/824501600.pdf?src-supplier=Digi-Key, Manufacturer Part Number=824501600, Min Breakdown Voltage=7.02V, Mount="Surface Mount", Number of Bidirectional Channels=1, Number of Pins=2, Packaging="Cut Tape", Polarity=Bidirectional, Pricing 1="1=0,28000, 10=0,26100, 50=0,26100, 100=0,23400, 500=0,20400, 1000=0,17400, 10000=0,17400 (USD)", REACH SVHC=Unknown, RoHS=Yes, RoHS Compliant=Yes, Stock 1=780, Supplier 1=Mouser
F101: library part Fuse_1A_63V_1206, "Fuse Chip Fast Acting 1A 63V SMD Solder Pad 1206 Ceramic T/R Automotive", Case Code (Imperial)=1206, Case Code (Metric)=3216, Current Rating=1A, Manufacturer=Littelfuse, Max Operating Temperature=150°C, Min Operating Temperature=-55°C, Supplier Part Number 1=F10001CT-ND, Voltage Rating (AC)=63V, Approvals=CSA,cURus, Case/Package=1206, Category=Fuses, ComponentLink1Description=https://www.littelfuse.com/~/media/electronics/datasheets/fuses/littelfuse_fuse_437a_datasheet.pdf.pdf?src-supplier=Digi-Key, ComponentLink1URL=https://www.littelfuse.com/~/media/electronics/datasheets/fuses/littelfuse_fuse_437a_datasheet.pdf.pdf?src-supplier=Digi-Key, ComponentLink2Description="Where buy it", ComponentLink2URL=https://www.mouser.es/ProductDetail/Littelfuse/0437001WRA?qs=DXv0QSHKF4z9CJhPXjxR%252BA%3D%3D, Fuse Type="Board Mount (Cartridge Style Excluded)", Manufacturer Part Number=0437001.WRA, Mount="Surface Mount", Packaging="Tape and Reel", Pricing 1="1=1,52000, 5=1,47000, 10=1,37600, 50=1,13860, 100=0,94880, 250=0,92508, 500=0,78276, 1000=0,68788 (USD)", RoHS=Yes, Stock 1=5820, Supplier 1=Digi-Key, Voltage Rating (DC)=63V
J101 J102: library part J_Jumper, "CONN HEADER 2 POS 2.54", Color=Black, Current Rating=3A, Manufacturer=Molex, Max Operating Temperature=125°C, Maximum current="3 A", Maximum voltage="250 V AC", Min Operating Temperature=-40°C, Supplier Part Number 1=8281581, Temperature rating="-40° to +105°C", Voltage Rating=250V, .Creator=GP, Application=Shortcircuit, Category=Connector, Category type=PCB-PCB, ComponentLink1Description=Datasheet, ComponentLink1URL=https://www.we-online.com/catalog/datasheet/61300211121.pdf, ComponentLink2Description="Where buy it", ComponentLink2URL=https://www.we-online.com/catalog/en/PHD_2_54_THT_PIN_HEADER_6130XX11121?sq=61300211121&sp=https%3A%2F%2Fwww.we-online.com%2Fweb%2Fen%2Fwuerth_elektronik%2Fsearchpage.php%3Fsearch%3D61300211121#61300211121, ComponentLink3Description=https://datasheet.ciiva.com/13619/6130xx11121-48870-13619345.pdf?src-supplier=Mouser, ComponentLink3URL=https://datasheet.ciiva.com/13619/6130xx11121-48870-13619345.pdf?src-supplier=Mouser, Connections=1x2, Connector Type="Male Pin", Contact Gender=Male, Contact Material="Copper Alloy,Copper", Contact Mating Length=0.236inch, Contact Plating=Gold, Flammability=94V-0, Gender=Male, Housing Material=PBT, Lead Free="Lead Free", Manufacturer Part Number=61300211121, Mount="Through hole", Number of Contacts=2, Number of Positions=2, Number of Rows=1, Orientation=Vertical, Packaging=Bulk, Pitch=0.1inch, Pricing 1="5=0,14100, 50=0,09700, 100=0,07800, 200=0,07300, 500=0,06800 (USD)", Product name="Pin Header", REACH SVHC=Unknown, Stock 1=1855, Supplier="Würth Elektronik", Supplier 1=RSComponents, Termination="Through Hole"
J202: library part J_UART, "CONN HEADER 4 POS 2.54", Color=Black, Manufacturer 1="Wurth Electronics", Supplier Part Number 1=8281594, .Creator=AC, Category="Headers and Wire Housings", ComponentLink1Description=http://www.farnell.com/cad/1737268.pdf?src-supplier=Element14, ComponentLink1URL=http://www.farnell.com/cad/1737268.pdf?src-supplier=Element14, ComponentLink2Description=https://katalog.we-online.de/em/datasheet/6130xx11121.pdf?src-supplier=Digi-Key, ComponentLink2URL=https://katalog.we-online.de/em/datasheet/6130xx11121.pdf?src-supplier=Digi-Key, Connector Type="Male Pin", Contact Material=Copper, Contact Mating Length=0.236inch, Contact Plating=Gold, Gender=Male, Lead Free="Lead Free", Manufacturer Part Number 1=61300411121, Mount="Through Hole", Number of Contacts=4, Number of Positions=4, Number of Rows=1, Packaging=Bulk, Pitch=0.1inch, Pricing 1="5=0,19500, 250=0,08000, 500=0,07700, 2500=0,07500, 5000=0,07200 (USD)", REACH SVHC=Unknown, RoHS=Yes, RoHS Compliant=Yes, Stock 1=1, Supplier 1=RSComponents, Termination=Solder
L101: library part L_47u-490mA_CF, "Inductor Power Unshielded Wirewound 47uH 10% 100KHz Ferrite 490mA 546mOhm DCR T/R", Case/Package=Nonstandard, Current Rating=490mA, DC Resistance (DCR)=546mR, Inductance=47uH, Manufacturer=Sumida, Max Operating Temperature=100°C, Min Operating Temperature=-40°C, Package Quantity=2000, Supplier Part Number 1=851-CDC5D23BNP-470KC, Test Frequency=100kHz, Tolerance=10%, .Creator=GP, Category="Fixed Inductors", ComponentLink1Description=http://www.mouser.com/ds/2/390/CDC5D23B-465898.pdf?src-supplier=Mouser, ComponentLink1URL=http://www.mouser.com/ds/2/390/CDC5D23B-465898.pdf?src-supplier=Mouser, ComponentLink3Description=http://products.sumida.com/products/pdf/CDC5D23B.pdf?src-supplier=Digi-Key, ComponentLink3URL=http://products.sumida.com/products/pdf/CDC5D23B.pdf?src-supplier=Digi-Key, Core Material=Ferrite, Height=2.5mm, Height - Seated (Max)=0.098inch, Lead Free="Lead Free", Length=0.228inch, Manufacturer Part Number=CDC5D23BNP-470KC, Max DC Current=490mA, Mount="Surface Mount", Packaging="Tape and Reel", Pricing 1="1=0,95000, 10=0,71100, 50=0,71100, 100=0,59700, 1000=0,40600, 10000=0,38100 (USD)", RoHS=Yes, RoHS Compliant=Yes, Series=CDC5D23B, Shielding=Unshielded, Stock 1=3779, Supplier 1=Mouser, Termination=SMD/SMT, Weight=0.007584oz, Width=5.8mm
L501: library part L47u-60mA_CF, "WE-GF Series; Wire-wound SMD Inductor with Ferrite Core; 47 µH", Case/Package=1210, DC Resistance (DCR)=7R, Inductance=47uH, Inductance Tolerance=10%, Manufacturer 1="Wurth Electronics", Max DC Current=60mA, Max Operating Temperature=105°C, Min Operating Temperature=-40°C, Self Resonant Frequency=15MHz, Supplier Part Number 1=732-14034-1-ND, Category="Fixed Inductors", ComponentLink1Description=https://datasheet.ciiva.com/11801/0900766b802e95df-11801953.pdf?src-supplier=RSComponents, ComponentLink1URL=https://datasheet.ciiva.com/11801/0900766b802e95df-11801953.pdf?src-supplier=RSComponents, ComponentLink2Description="Wurth Elektronik", ComponentLink2URL=https://www.we-online.com/catalog/en/WE-GF?sq=744764147&sp=https%3A%2F%2Fwww.we-online.com%2Fweb%2Fen%2Fwuerth_elektronik%2Fsearchpage.php%3Fsearch%3D744764147#744764147, Core Material=Ferrite, Depth=2.5mm, Height=2.2mm, Length=3.2mm, Manufacturer Part Number 1=744764147, Mount="Surface Mount", Packaging="Cut Tape", Pricing 1="1=0,66000, 10=0,59500, 50=0,54800, 100=0,51200, 500=0,46500 (USD)", REACH SVHC=Unknown, RoHS=Yes, RoHS Compliant=Yes, Series=WE-GF, Stock 1=156, Supplier 1=Digi-Key, Tolerance=10%
R101 R102 R201 R202 R203 R303: library part R100-1206FTK, "Res Thick Film 1206 100 Ohm 1% 0.25W(1/4W) ±200ppm/C Pad SMD T/R", Case Code (Imperial)=1206, Case Code (Metric)=3216, Manufacturer="TE Connectivity", Max Operating Temperature=125°C, Max Power Dissipation=250mW, Min Operating Temperature=-55°C, Number of Resistors=1, Package Quantity=5000, Resistance=100R, Resistor Type="Thick Film", Supplier Part Number 1=A106068CT-ND, Temperature Coefficient=200ppm/°C, Tolerance=1%, Voltage Rating=200V, Case/Package=1206, Category=Resistor, ComponentLink1Description=Datasheet, ComponentLink1URL=https://docs.rs-online.com/7aab/0900766b815b7339.pdf, ComponentLink2Description="Where buy it", ComponentLink2URL=https://es.rs-online.com/web/p/resistencias-de-montaje-en-superficie/2232120, ComponentLink3Description=https://datasheet.ciiva.com/11808/0900766b800a696e-11808648.pdf?src-supplier=RSComponents, ComponentLink3URL=https://datasheet.ciiva.com/11808/0900766b800a696e-11808648.pdf?src-supplier=RSComponents, ComponentLink4Description=https://datasheet.ciiva.com/16763/70063020-16763547.pdf?src-supplier=Allied+Electronics, ComponentLink4URL=https://datasheet.ciiva.com/16763/70063020-16763547.pdf?src-supplier=Allied+Electronics, ComponentLink5Description=https://datasheet.ciiva.com/5562/eng-ds-1773204-g-5562604.pdf?src-supplier=Mouser, ComponentLink5URL=https://datasheet.ciiva.com/5562/eng-ds-1773204-g-5562604.pdf?src-supplier=Mouser, Depth=1.55mm, ELV=Compliant, Height=0.55mm, Length=3.1mm, Manufacturer Part Number=CRG1206F100R, Mount="Surface Mount", Number of Terminations=2, Packaging="Tape and Reel", Power Rating=250mW, Pricing 1="1=0,10000, 10=0,07600, 100=0,02920, 1000=0,01285, 2500=0,01110 (USD)", Radiation Hardening=No, RoHS=Yes, RoHS Compliant=Yes, Series="CRG, Neohm", Stock 1=13476, Supplier 1=Digi-Key, Technology="THICK FILM", Termination=Solder, Weight=0.000571oz, Width=1.55mm